# Altium PCB cjb.PcbDoc (part 1 of 2)
Units mil, origin at the board's own origin, x right, y up, seen from the top; angles counter-clockwise.
Board outline 3395 x 2755 mil, 2 copper layers (Top Layer, Bottom Layer), stack 62.8 mil thick; 117 components, 75 nets, 401 pads, 144 vias.
Unrouted connection lines stored in the file: 2.
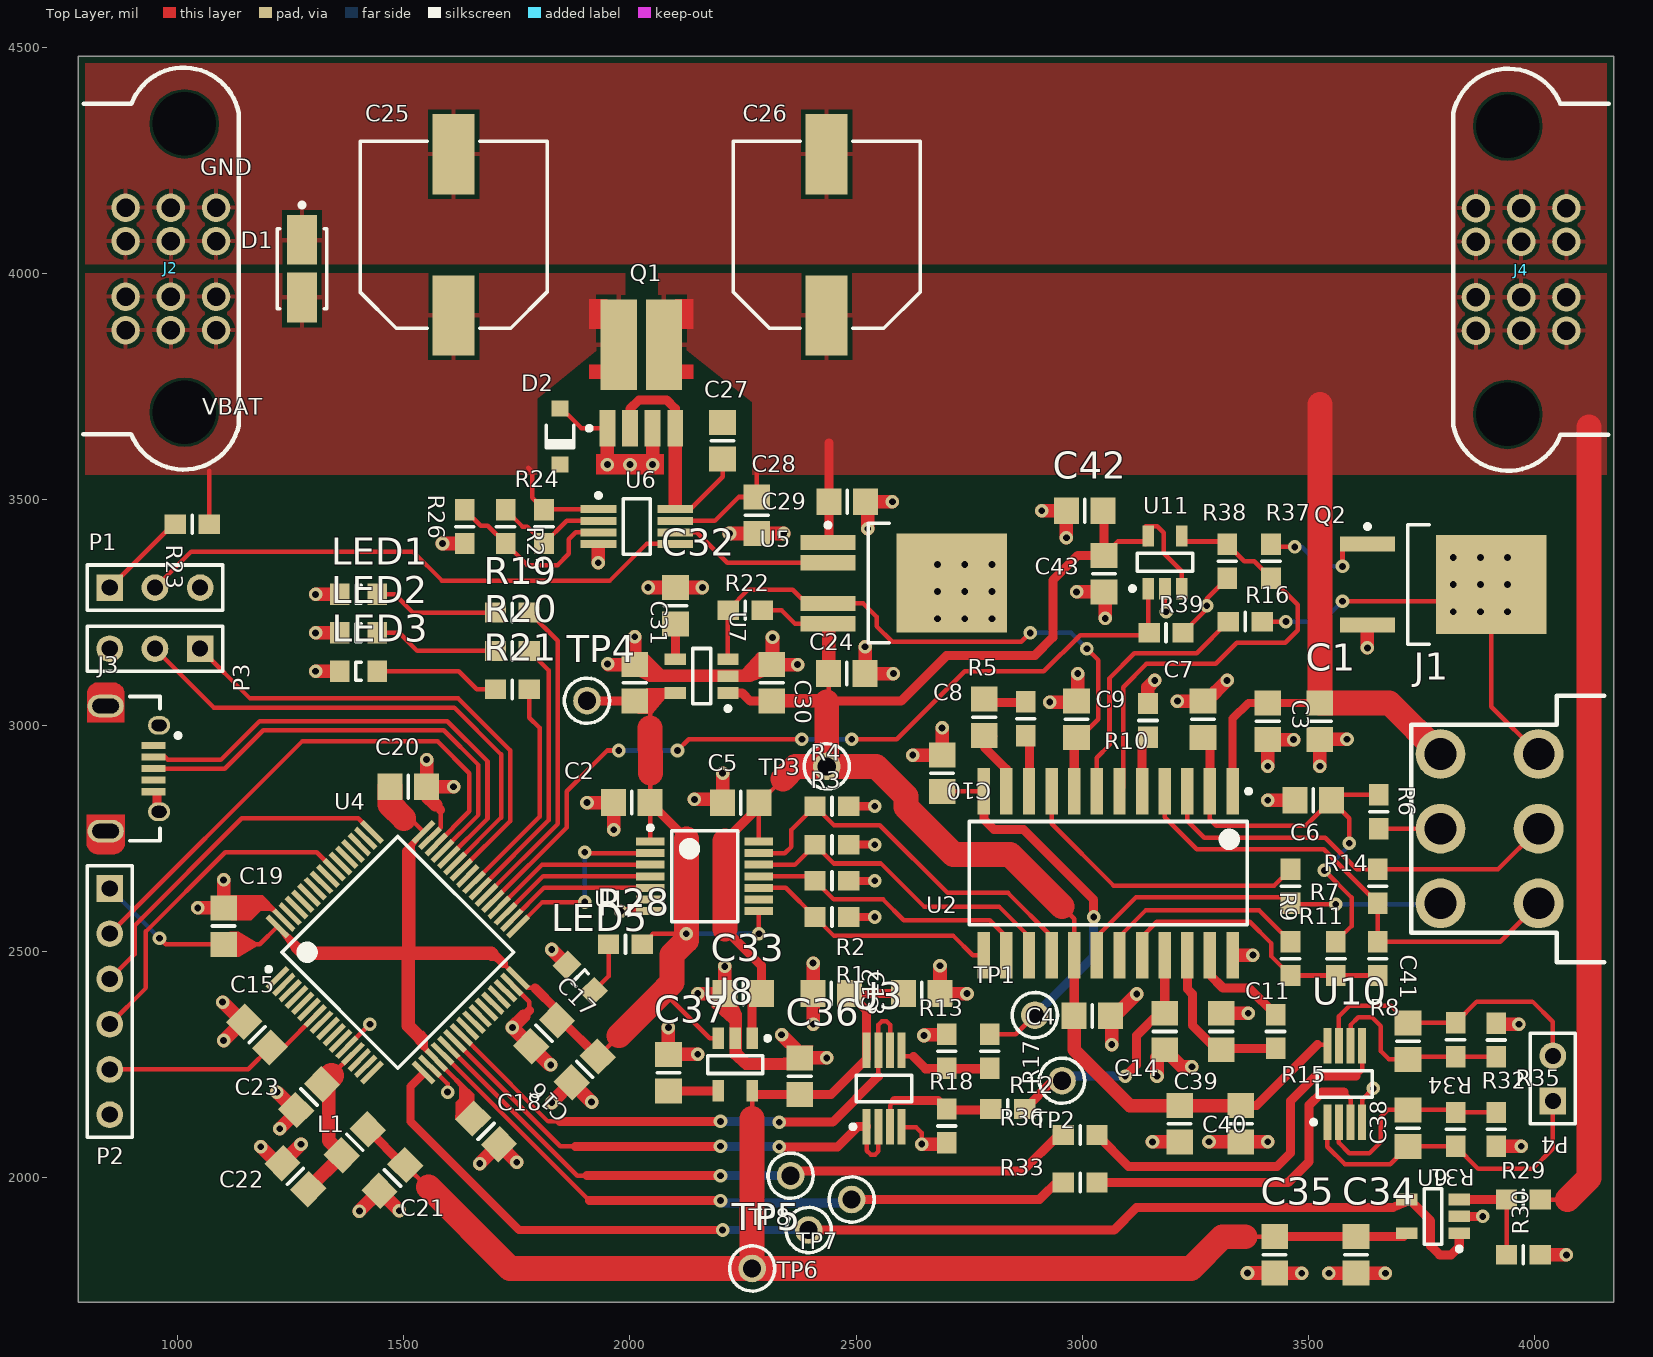
[diagram p0: Top Layer view]
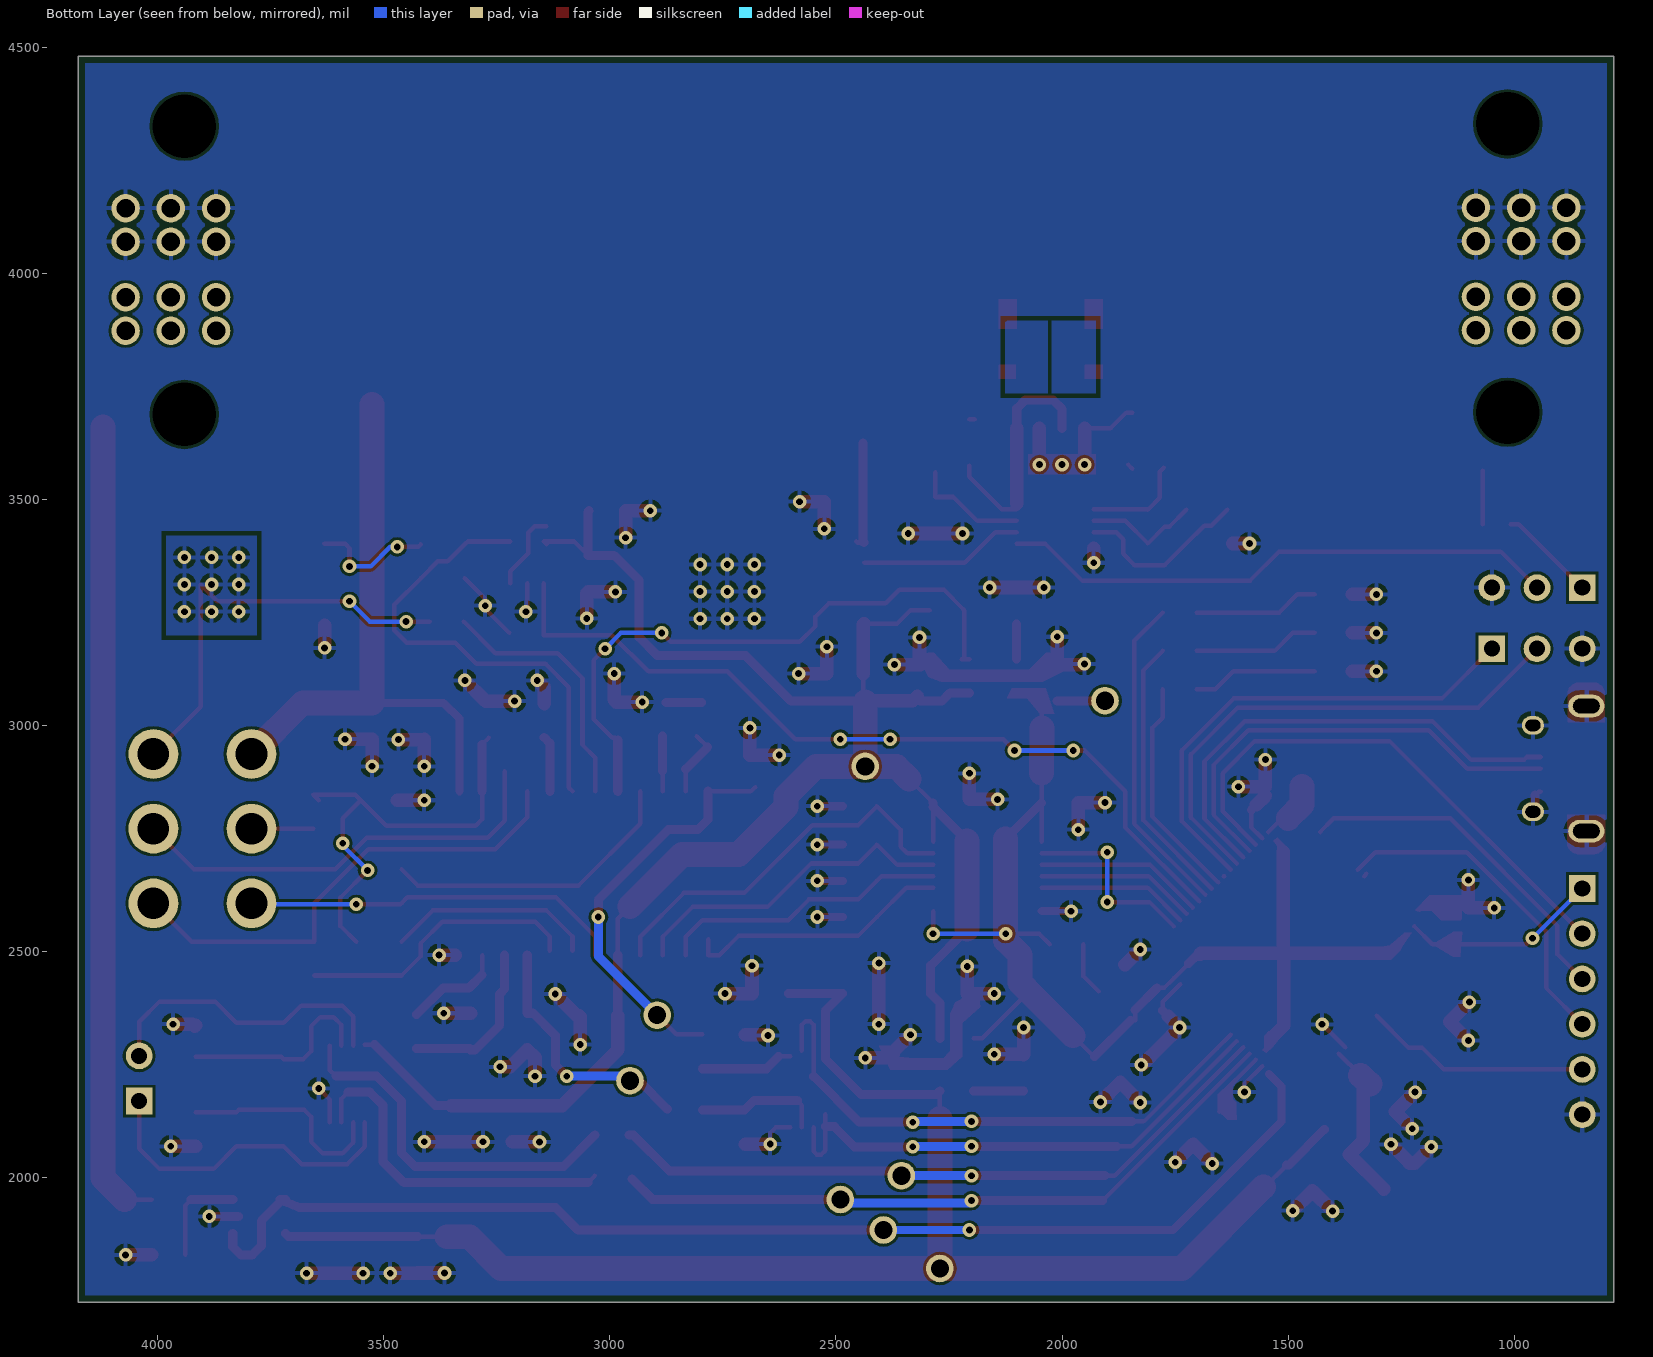
[diagram p1: Bottom Layer view, seen from below]

## Layer stack, top to bottom
Top Solder: solder mask 1, Solder Resist, Dk 3.5
Top Layer: signal copper 1.4
Dielectric 1: core 60, FR4, Dk 4.6
Bottom Layer: signal copper 1.4
Bottom Solder: solder mask 1, Solder Resist, Dk 3.5

## Board outline
780,1725 780,4480 4175,4480 4175,1725

## Design rules (kind name [scope] priority, off if disabled: settings)
BoardOutlineClearance [All] p1: gap=15 ignorepadtopadclearanceinfootprint=FALSE
Clearance [All] p1: gap=6 ignorepadtopadclearanceinfootprint=FALSE
DiffPairsRouting [All] p1: maxlimit=10 minlimit=10 mostfreqgap=10 toplayer_minwidth=10 toplayer_maxwidth=15 toplayer_prefwidth=10 bottomlayer_minwidth=10 bottomlayer_maxwidth=15 bottomlayer_prefwidth=10 maxuncoupledlength=500
HoleSize [All] p1: absolutevalues=TRUE maxlimit=200 minlimit=10 maxpercent=80.000 minpercent=20.000
MinimumAnnularRing [All] p1: minimumring=5
MinimumSolderMaskSliver [All] p1: minsoldermaskwidth=4
PlaneConnect [All] p1: planeconnectstyle=Direct reliefexpansion=20 reliefentries=4 reliefconductorwidth=10 reliefairgap=10
PolygonConnect [All] p1: connectstyle=Relief reliefconductorwidth=10 reliefentries=4 polygonreliefangle="90 Angle" airgapwidth=10
RoutingVias [All] p1: holewidth=6 width=16 viastyle="Through Hole" minholewidth=6 minwidth=16 maxholewidth=28 maxwidth=50
SilkToSolderMaskClearance [IsPad] p1: minsilkscreentomaskgap=6 clearancetoexposedcopper=TRUE
SolderMaskExpansion [All] p1: expansion=3
Width [All] p1: maxlimit=100 minlimit=6 preferedwidth=10 minimp=40.000000 maximp=50.000000 favimp=45.000000
25 further rules are at their usual default settings.

## Classes and differential pairs
component class U_heater: C42 C43 Q2 R37 R38 R39 U11
component class U_breakout: C38 C39 C40 C41 J1 J2 J3 J4 P2 P3 P4 R31 R32 R33 R34 R35 R36 TP7 TP8 U10
component class U_power: C24 C25 C26 C27 C28 C29 C30 C31 C32 C33 C34 C35 C36 C37 D1 D2 LED5 P1 Q1 R22 R23 R24 R25 R26 R28 R29 R30 TP3 TP4 TP5 TP6 U5 U6 U7 U8 U9
component class U_microcontroller: C15 C16 C17 C18 C19 C20 C21 C22 C23 L1 LED1 LED2 LED3 R19 R20 R21 U4
component class U_cj125: C1 C2 C3 C4 C5 C6 C7 C8 C9 C10 C11 C12 C13 C14 R1 R2 R3 R4 R5 R6 R7 R8 R9 R10 R11 R12 R13 R14 R15 R16 R17 R18 TP1 TP2 U1 U2 U3
differential pair USB_D: +USB_D_P -USB_D_N

## Components (designator, comment, footprint, x,y, rotation, side; value= is the part's Value field where it differs from the comment)
C1 "Generic 0805 Capacitor" 0805 3525,3010 r270 top value=1u
C2 "Generic 0805 Capacitor" 0805 2003.92,2829.86 r0 top value=100n
C3 "Generic 0805 Capacitor" 0805 3410,3010 r90 top value=33n
C4 "Generic 0805 Capacitor" 0805 3022,2358.35 r0 top value=33n
C5 "Generic 0805 Capacitor" 0805 2245,2829.21 r0 top value=100n
C6 "Generic 0805 Capacitor" 0805 3510,2835 r180 top value=DNI
C7 "Generic 0805 Capacitor" 0805 3266.71,3013.79 r90 top value=2.2n
C8 "Generic 0805 Capacitor" 0805 2783.33,3018.79 r90 top value=100n
C9 "Generic 0805 Capacitor" 0805 2987.06,3013.79 r90 top value=1n
C10 "Generic 0805 Capacitor" 0805 2690,2894.51 r270 top value=100n
C11 "Generic 0805 Capacitor" 0805 3307.06,2323.79 r270 top value=100n
C12 "Generic 0805 Capacitor" 0805 2645,2407.6 r180 top value=1u
C13 "Generic 0805 Capacitor" 0805 2445,2407.6 r0 top value=100n
C14 "Generic 0805 Capacitor" 0805 3182.06,2323.79 r90 top value=100n
C15 "Generic 0805 Capacitor" 0805 1175.72,2316.93 r315 top value=100n
C16 "Generic 0805 Capacitor" 0805 1900,2240 r45 top value=4.7u
C17 "Generic 0805 Capacitor" 0805 1810,2320 r45 top value=100n
C18 "Generic 0805 Capacitor" 0805 1681.72,2102.93 r135 top value=100n
C19 "Generic 0805 Capacitor" 0805 1101.72,2556.93 r270 top value=100n
C20 "Generic 0805 Capacitor" 0805 1510,2865 r180 top value=100n
C21 "Generic 0805 Capacitor" 0805 1475,2000 r45 top value=1u
C22 "Generic 0805 Capacitor" 0805 1260.45,2003.93 r315 top value=1u
C23 "Generic 0805 Capacitor" 0805 1290.45,2178.93 r45 top value=100n
C24 "Generic 0805 Capacitor" 0805 2479.41,3115 r0 top value=1u
C25 "Generic Electrolytic Capacitor" NIC-UUX2A470MNL1GS_M 1610,4085 r90 top value=22u
C26 "Generic Electrolytic Capacitor" NIC-UUX2A470MNL1GS_M 2434.74,4085 r90 top value=22u
C27 "Generic 0805 Capacitor" 0805 2204.65,3630 r90 top
C28 "Generic 0805 Capacitor" 0805 2280,3465 r90 top value=4.7u
C29 "Generic 0805 Capacitor" 0805 2480,3495 r180 top value=100n
C30 "Generic 0805 Capacitor" 0805 2313.5,3094.44 r270 top value=100n
C31 "Generic 0805 Capacitor" 0805 2010.5,3094.44 r270 top value=2.2u
C32 "Generic 0805 Capacitor" 0805 2100.43,3265 r270 top value=10n
C33 "Generic 0805 Capacitor" 0805 2250,2407.6 r180 top value=100n
C34 "Generic 0805 Capacitor" 0805 3605,1830 r90 top value=1u
C35 "Generic 0805 Capacitor" 0805 3425,1830 r90 top value=100n
C36 "Generic 0805 Capacitor" 0805 2375,2225 r270 top value=2.2u
C37 "Generic 0805 Capacitor" 0805 2085,2232.6 r270 top value=10n
C38 "Generic 0805 Capacitor" 0805 3720,2110 r270 top value=DNI
C39 "Generic 0805 Capacitor" 0805 3350,2120 r90 top value=1u
C40 "Generic 0805 Capacitor" 0805 3215,2120 r90 top value=100n
C41 "Generic 0805 Capacitor" 0805 3720,2302.67 r90 top value=DNI
C42 "Generic 0805 Capacitor" 0805 3005,3475 r0 top value=1u
C43 "Generic 0805 Capacitor" 0805 3047.6,3336 r90 top value=100n
D1 "SMAJ58CA" VISH-DO-214AC-2_M 1275,4010 r270 top
D2 "BZT52C15T-7" DIOD-SOD123-2_V 1845,3639.04 r270 top
J1 "IPBT-103-H1-XX-D-RA" IPBT-103-H1-XX-D-RA 3900,2772.13 r270 top
J2 "MPT-02-01-XX-X-RA-SD" MPT-02-01-XX-X-RA-SD 985,4008.88 r270 top
J3 "ZX62D-B-5PA8" HIRO-ZX62D-B-5PA8_V 900,2905 r270 top
J4 "MPT-02-01-XX-X-RA-SD" MPT-02-01-XX-X-RA-SD 3969.92,4009 r90 top
L1 "MI0805K601R-10" 0805 1391.72,2078.93 r225 top
LED1 "150080SS75000" 0805_A 1400,3290 r0 top
LED2 "150080SS75000" 0805_A 1400,3205 r0 top
LED3 "150080SS75000" 0805_A 1400,3120 r0 top
LED5 "150080SS75000" 0805_A 1890,2441.86 r315 top
P1 "Header 3" HDR1X3 850,3305 r0 top
P2 "Header 6" HDR1X6 850,2640 r270 top
P3 "Header 3" HDR1X3 1050,3170 r180 top
P4 "Header 2" HDR1X2 4040,2170 r90 top
Q1 "SI7288DP-T1-GE3" VISH-POWERPAKSO-8_A_V 2025,3802.21 r90 top
Q2 "NTD5865NLT4G" TO-252AA 3797.68,3311.86 r0 top
R1 "Generic 0603 Resistor" 0603 2446.5,2576.86 r0 top value="100k 5%"
R2 "Generic 0603 Resistor" 0603 2446.5,2656.86 r0 top value="100k 5%"
R3 "Generic 0603 Resistor" 0603 2446.5,2736.86 r0 top value="100k 5%"
R4 "Generic 0603 Resistor" 0603 2446.5,2821.86 r0 top value="100k 5%"
R5 "Generic 0603 Resistor" 0603 2875,3015 r270 top value="31.6k 1%"
R6 "Generic 0603 Resistor" 0603 3655,2809.53 r90 top value=0
R7 "Generic 0603 Resistor" 0603 3460,2645 r90 top value=301
R8 "Generic 0603 Resistor" 0603 3652.68,2485 r270 top value=470k
R9 "Generic 0603 Resistor" 0603 3460,2485 r90 top value=4.7k
R10 "Generic 0603 Resistor" 0603 3145,3011.39 r90 top value="10k 5%"
R11 "Generic 0603 Resistor" 0603 3560.43,2485 r270 top value=100k
R12 "Generic 0603 Resistor" 0603 2795,2280 r270 top value="187k 1%"
R13 "Generic 0603 Resistor" 0603 2700,2280 r270 top value="365k 1%"
R14 "Generic 0603 Resistor" 0603 3652.68,2645 r270 top value=61.9
R15 "Generic 0603 Resistor" 0603 3427.06,2323.79 r270 top value="100k 5%"
R16 "Generic 0603 Resistor" 0603 3360,3230 r180 top
R17 "Generic 0603 Resistor" 0603 2835,2152.4 r180 top value="187k 1%"
R18 "Generic 0603 Resistor" 0603 2700,2115 r90 top value="365k 1%"
R19 "Generic 0603 Resistor" 0603 1740,3250 r0 top value=470
R20 "Generic 0603 Resistor" 0603 1740,3165 r0 top value=470
R21 "Generic 0603 Resistor" 0603 1740,3080 r0 top value=470
R22 "Generic 0603 Resistor" 0603 2255,3255 r0 top value="100k 5%"
R23 "Generic 0603 Resistor" 0603 1032.6,3445 r0 top value="510k 5%"
R24 "Generic 0603 Resistor" 0603 1810,3440 r270 top value="6.34M 1%"
R25 "Generic 0603 Resistor" 0603 1725,3440 r270 top value="95.3k 1%"
R26 "Generic 0603 Resistor" 0603 1635,3440 r270 top value="205k 1%"
R28 "Generic 0603 Resistor" 0603 1990,2516.58 r0 top value=470
R29 "Generic 0603 Resistor" 0603 3975,1952.4 r180 top value="768k 1%"
R30 "Generic 0603 Resistor" 0603 3975,1830 r180 top value="187k 1%"
R31 "Generic 0603 Resistor" 0603 3825,2107.47 r270 top value=187k
R32 "Generic 0603 Resistor" 0603 3915,2107.47 r90 top value=365k
R33 "Generic 0603 Resistor" 0603 2995,1990 r0 top value=150k
R34 "Generic 0603 Resistor" 0603 3825,2305.62 r90 top value=187k
R35 "Generic 0603 Resistor" 0603 3915,2305 r270 top value=365k
R36 "Generic 0603 Resistor" 0603 2995,2095 r0 top value=150k
R37 "Generic 0603 Resistor" 0603 3417.05,3363.15 r90 top
R38 "Generic 0603 Resistor" 0603 3320.34,3363.15 r90 top value=DNI
R39 "Generic 0603 Resistor" 0603 3185,3205 r180 top value=100k
TP1 "5001" KSTN-5001 2895,2360 r90 top
TP2 "5001" KSTN-5001 2955,2215 r90 top
TP3 "5001" KSTN-5001 2435,2910 r0 top
TP4 "5001" KSTN-5001 1905,3055 r0 top
TP5 "5001" KSTN-5001 2270,1800 r0 top
TP6 "5001" KSTN-5001 2395,1885 r90 top
TP7 "5001" KSTN-5001 2490,1952.4 r90 top
TP8 "5001" KSTN-5001 2355,2005 r90 top
U1 "LSF0204PWR" PW0014A_M 2165,2666.86 r0 top
U2 "CJ125" SOIC-24 3057.06,2673.79 r270 top
U3 "MCP6L02T-E/MS" MSOP8_M 2561.65,2198 r90 top
U4 "STM32L475RCT3" STM-LQFP64_L 1486.72,2498.93 r45 top
U5 "TLS850D0TEV50ATMA1" KVU0005A_M 2605,3315 r0 top
U6 "LT4367HMS" MSOP8_M 2015,3440 r0 top
U7 "TPS79933QDDCRQ1" DDC0005A_M 2158.5,3109.44 r180 top
U8 "TPS79933QDDCRQ1" DDC0005A_M 2232.6,2250.67 r270 top
U9 "MCP6L01T-E/OT" DDC0005A_M 3775,1915 r180 top
U10 "MCP6L02T-E/MS" MSOP8_M 3580,2208 r90 top
U11 "UCC27519DBVT" DDC0005A_M 3182.6,3361 r90 top

## Footprints (in the part's own frame and the unit in brackets; to place one, negate y for a bottom-side part, rotate by r counter-clockwise, add the part's x,y. Pads: shape width x height; smd on the part's side, far side on the other; paste and mask are expansions set on the pad)
0603 [mm] "0603 - Based on VIshey Recommendations"
  rect 1.2x1.1 smd mask+0.1: 1(-0.95,0) 2(0.95,0)
  silkscreen extent 0,-0.51 0,0.51, body extent -0.8,-0.4 0.8,0.4, height 0.76
0805 [mm] "0805 - Based on VIshey Recommendations"
  rect 1.4x1.5 smd mask+0.1: 1(-1.025,0) 2(1.025,0)
  silkscreen extent 0,-0.64 0,0.64, body extent -1,-0.63 1,0.63, height 1.02
0805_A [mm] "Chip LED, 2-Leads, Body 2.0x1.3mm, IPC Medium Density"
  rect 1.1x1.2 smd: 1(-1.05,0) 2(1.05,0)
  silkscreen extent -0.15,-0.5 0.15,0.5, body extent -1,-0.62 1,0.63, height 0.68
DDC0005A_M [mm] "SOT23, 5-Leads, Body 3.05x1.75mm, Pitch 0.95mm, IPC Low Density"
  rect 1.2x0.65 smd mask+0.076: 1(-1.475,0.95) 2(-1.475,0) 3(-1.475,-0.95) 4(1.475,-0.95) 5(1.475,0.95)
  silkscreen extent -1.6,-1.55 0.5,1.95, body extent -1.5,-1.52 1.5,1.52, height 1.45
DIOD-SOD123-2_V [mm] "SOD123, 2-Leads, Body 2.7x1.55mm, Height 1.45mm"
  rect 0.9x0.95 smd mask+0.076: 1(-1.575,0) 2(1.575,0)
  silkscreen extent -0.64,-0.82 0.64,0.77, body extent -1.35,-0.77 1.35,0.77, height 1.45
HDR1X2 [mm] "Connector; Header; 2 Position"
  rect 1.5x1.5 hole 0.9: 1(0,0)
  round 1.5 hole 0.9: 2(2.54,0)
  silkscreen extent -1.27,-1.27 3.81,1.27
HDR1X3 [mm] "Connector; Header; 3 Position"
  rect 1.5x1.5 hole 0.9: 1(0,0)
  round 1.5 hole 0.9: 2(2.54,0) 3(5.08,0)
  silkscreen extent -1.27,-1.27 6.35,1.27
HDR1X6 [mm] "Connector; Header; 6 Position"
  rect 1.5x1.5 hole 0.9: 1(0,0)
  round 1.5 hole 0.9: 2(2.54,0) 3(5.08,0) 4(7.62,0) 5(10.16,0) 6(12.7,0)
  silkscreen extent -1.27,-1.27 13.97,1.27
HIRO-ZX62D-B-5PA8_V [mm] "SMD, 5-Leads, Body 7.5x5mm, Pitch 0.65mm"
  rect 0.4x1.35 smd mask+0.051: 1(-1.3,1.175) 2(-0.65,1.175) 3(0,1.175) 4(0.65,1.175) 5(1.3,1.175)
  oval 1.05x1.25 hole 0.65 slot 0.85 at 90 deg mask+0.076: 6(-2.425,1.5) 7(2.425,1.5)
  oval 1.27x2.032 hole 0.825 slot 1.5 at 90 deg: 8(-3.512,-1.5) 9(3.512,-1.5)
  Top Layer region: 4.2,-2.45 4.391,-2.412 4.554,-2.304 4.662,-2.141 4.7,-1.95 4.7,-1.95 4.7,-1.05 4.662,-0.859 4.554,-0.696 4.391,-0.588 4.2,-0.55 4.2,-0.55 2.6,-0.55 2.6,-2.45
  Top Layer region: -4.2,-2.45 -4.391,-2.412 -4.554,-2.304 -4.662,-2.141 -4.7,-1.95 -4.7,-1.95 -4.7,-1.05 -4.662,-0.859 -4.554,-0.696 -4.391,-0.588 -4.2,-0.55 -4.2,-0.55 -2.6,-0.55 -2.6,-2.45
  Top Layer region: -4.2,-2.54 -4.492,-2.478 -4.718,-2.285 -4.826,-2.007 -4.826,-2.007 -4.826,-1.016 -4.724,-0.729 -4.497,-0.526 -4.2,-0.457 -4.2,-0.457 -2.6,-0.457 -2.6,-2.54
  Top Layer region: 4.2,-2.565 4.487,-2.489 4.704,-2.287 4.801,-2.007 4.801,-2.007 4.801,-0.991 4.706,-0.709 4.488,-0.506 4.2,-0.432 4.2,-0.432 2.6,-0.432 2.6,-2.565
  silkscreen extent -4.05,-0.15 4.05,2.69, body extent -4.05,-4.25 4.05,1.55, height 2.75
IPBT-103-H1-XX-D-RA [mil]
  round 110 hole 70 mask+3: 1(-165,108.5) 2(0,108.5) 3(165,108.5) 4(-165,-108.5) 5(0,-108.5) 6(165,-108.5)
  silkscreen extent -294,-174 295,254, body extent -274,-131 274,574, height 439
KSTN-5001 [mm] "Test Point, Through Hole, Dia 2.54mm"
  round 1.55 hole 1.016: 1(0,0)
  silkscreen extent -1.27,-1.27 1.27,1.27, body extent -1.24,-1.24 1.25,1.25, height 4.62
KVU0005A_M [mm] "DPAK, 5-Leads, Body 6.22x6.7mm, Pitch 1.14mm, IPC Low Density"
  rect 3.1x0.85 smd mask+0.076: 1(-4.25,2.28) 2(-4.25,1.14) 4(-4.25,-1.14) 5(-4.25,-2.28)
  rect 6.2x5.55 smd mask+0.076: 6(2.7,0)
  silkscreen extent -4.37,-3.35 -0.8,3.38, body extent -4.77,-3.25 5.13,3.25, height 2.32
MPT-02-01-XX-X-RA-SD [mm]
  round 1.6 hole 1.04 mask+0.075: 1(-3.458,2.54) 2(-3.458,0) 3(-3.458,-2.54) 4(-1.578,2.54) 5(-1.578,0) 6(-1.578,-2.54) 7(1.542,2.54) 8(1.542,0) 9(1.542,-2.54) 10(3.423,2.54) 11(3.423,0) 12(3.423,-2.54)
  round 0 hole 3.56 unplated: 25(-8.157,0.76) 26(8.026,0.76)
  silkscreen extent -11.32,-4.92 11.25,3.8, body extent -10.73,-11.49 10.63,3.32, height 10.93
MSOP8_M [mm] "TSOP, 8-Leads, Body 3x3mm, Pitch 0.65mm, IPC Low Density"
  rect 2x0.45 smd mask+0.046: 1(-2.15,0.975) 2(-2.15,0.325) 3(-2.15,-0.325) 4(-2.15,-0.975) 5(2.15,-0.975) 6(2.15,-0.325) 7(2.15,0.325) 8(2.15,0.975)
  silkscreen extent -2.27,-1.55 0.75,1.87, body extent -1.55,-1.55 1.55,1.55, height 1.1
NIC-UUX2A470MNL1GS_M [mm] "Aluminum Electrolytic Capacitor, Body 10.5x10.5mm, IPC Low Density"
  rect 4.5x2.35 smd mask+0.076: 1(-4.525,0) 2(4.525,0)
  silkscreen extent -5.25,-5.25 5.25,5.25, body extent -5.65,-5.25 5.65,5.25, height 10.8
PW0014A_M [mm] "SOP, 14-Leads, Body 5.1x4.5mm, Pitch 0.65mm, IPC Low Density"
  rect 1.6x0.45 smd mask+0.046: 1(-3.05,1.95) 2(-3.05,1.3) 3(-3.05,0.65) 4(-3.05,0) 5(-3.05,-0.65) 6(-3.05,-1.3) 7(-3.05,-1.95) 8(3.05,-1.95) 9(3.05,-1.3) 10(3.05,-0.65) 11(3.05,0) 12(3.05,0.65) 13(3.05,1.3) 14(3.05,1.95)
  silkscreen extent -3.17,-2.55 1.85,2.85, body extent -3.21,-2.5 3.21,2.5, height 1
SOIC-24 [mm] "SOIC, 24-Leads, Body 15.4x7.5mm, Pitch 1.27mm, IPC Low Density"
  rect 2.6x0.7 smd mask+0.076: 1(-4.6,6.985) 2(-4.6,5.715) 3(-4.6,4.445) 4(-4.6,3.175) 5(-4.6,1.905) 6(-4.6,0.635) 7(-4.6,-0.635) 8(-4.6,-1.905) 9(-4.6,-3.175) 10(-4.6,-4.445) 11(-4.6,-5.715) 12(-4.6,-6.985) 13(4.6,-6.985) 14(4.6,-5.715) 15(4.6,-4.445) 16(4.6,-3.175) 17(4.6,-1.905) 18(4.6,-0.635) 19(4.6,0.635) 20(4.6,1.905) 21(4.6,3.175) 22(4.6,4.445) 23(4.6,5.715) 24(4.6,6.985)
  silkscreen extent -4.72,-7.8 2.9,8.01, body extent -5.26,-7.72 5.26,7.72, height 1.7
STM-LQFP64_L [mm] "QFP, 64-Leads, Body 10x10mm, Pitch 0.5mm, IPC High Density"
  rect 1.6x0.3 smd mask+0.038: 1(-5.8,3.75) 2(-5.8,3.25) 3(-5.8,2.75) 4(-5.8,2.25) 5(-5.8,1.75) 6(-5.8,1.25) 7(-5.8,0.75) 8(-5.8,0.25) 9(-5.8,-0.25) 10(-5.8,-0.75) 11(-5.8,-1.25) 12(-5.8,-1.75) 13(-5.8,-2.25) 14(-5.8,-2.75) 15(-5.8,-3.25) 16(-5.8,-3.75) 33(5.8,-3.75) 34(5.8,-3.25) 35(5.8,-2.75) 36(5.8,-2.25) 37(5.8,-1.75) 38(5.8,-1.25) 39(5.8,-0.75) 40(5.8,-0.25) 41(5.8,0.25) 42(5.8,0.75) 43(5.8,1.25) 44(5.8,1.75) 45(5.8,2.25) 46(5.8,2.75) 47(5.8,3.25) 48(5.8,3.75)
  rect 0.3x1.6 smd mask+0.038: 17(-3.75,-5.8) 18(-3.25,-5.8) 19(-2.75,-5.8) 20(-2.25,-5.8) 21(-1.75,-5.8) 22(-1.25,-5.8) 23(-0.75,-5.8) 24(-0.25,-5.8) 25(0.25,-5.8) 26(0.75,-5.8) 27(1.25,-5.8) 28(1.75,-5.8) 29(2.25,-5.8) 30(2.75,-5.8) 31(3.25,-5.8) 32(3.75,-5.8) 49(3.75,5.8) 50(3.25,5.8) 51(2.75,5.8) 52(2.25,5.8) 53(1.75,5.8) 54(1.25,5.8) 55(0.75,5.8) 56(0.25,5.8) 57(-0.25,5.8) 58(-0.75,5.8) 59(-1.25,5.8) 60(-1.75,5.8) 61(-2.25,5.8) 62(-2.75,5.8) 63(-3.25,5.8) 64(-3.75,5.8)
  silkscreen extent -5.92,-4.6 4.6,4.6, body extent -6,-6 6,6, height 1.6
TO-252AA [mm] "TO-252AA based on IRLR2908"
  rect 3.1x0.85 smd mask+0.076: 1(-4.25,2.28) 3(-4.25,-2.28)
  rect 6.2x5.55 smd mask+0.076: 4(2.7,0)
  silkscreen extent -4.37,-3.35 -0.8,3.38, body extent -4.77,-3.25 5.13,3.25, height 2.32
VISH-DO-214AC-2_M [mm] "DO-214AC, 2-Leads, Body 4.5x2.79mm, IPC Low Density"
  rect 2.8x1.7 smd mask+0.076: 1(-1.625,0) 2(1.625,0)
  silkscreen extent -3.7,-1.4 2.25,1.4, body extent -2.25,-1.39 2.25,1.4, height 2.29
VISH-POWERPAKSO-8_A_V [mil] "SMD, 8-Leads, Body 6.15x5.155mm, Pitch 1.27mm"
  rect 80x35 smd mask+3: 1(-145,75) 2(-145,25) 3(-145,-25) 4(-145,-75)
  rect 200x80 smd mask+3: 5(40,-50) 6(40,50)
  Top Layer region: -35,-115 -5,-115 -5,-77.5 -35,-77.5
  Top Layer region: -35,75 -5,75 -5,115 -35,115
  Top Layer region: 75,75 140,75 140,115 75,115
  Top Layer region: 75,-115 140,-115 140,-75 75,-75
  silkscreen extent -150,110 -140,120, body extent -141,-100 101,101, height 46

## Part data
C1 C2 C3 C4 C5 C6 C7 C8 C9 C10 C11 C12 C13 C14 C15 C16 C17 C18 C19 C20 C21 C22 C23 C24 C27 C28 C29 C30 C31 C32 C33 C34 C35 C36 C37 C38 C39 C40 C41 C42 C43: library part C_0805
C25 C26: library part C_can, "Generic PCAP_10x10 Can Aluminum Electrolytic Capacitor", Voltage=200V
D1: "Transient Voltage Suppressor, 6.40 to 231 V, 58 V Stand-off Voltage, Bi-Directional, -55 to 155 degC, 2-pin DO-214AC, Pb-Free, Tape and Reel", Manufacturer="Vishay Semiconductor", Operating Junction and Storage Temperature Range="-55 to 150 degC", PartNumber=SMAJ58CA-E3/5A, Supplier Part Number 1=SMAJ58CALFCT-ND, ComponentLink1Description="Manufacturer URL", ComponentLink1URL=http://www.vishay.com/, ComponentLink2Description=Datasheet, ComponentLink2URL=http://www.vishay.com/docs/88390/smaj50a.pdf, ComponentLink3Description="Package Specification", ComponentLink3URL=http://www.vishay.com/docs/88390/smaj50a.pdf, DatasheetVersion=12/8/2013, ID (uA)=2, IFSM="40 A", Mounting Technology="Surface Mount", PackageDescription="2-Pin DO-214AC (SMA), Body 4.245 x 2.665 mm", PackageReference=DO-214AC-2, Packing="Tape and Reel", PPPM (W)="400, 300", RoHS=TRUE, Supplier 1=Digi-Key, VBR Bi-Directional (V)="6.4 to 231", VWM (V)=58
D2: library part BZT52C15T, "Zener Diode 15V 300mW ±6% Surface Mount SOD-523", Manufacturer="Diodes Inc", Maximum Reverse Current="0.1 uA", Operating Temperature="-65 to 150 degC", PartNumber=BZT52C16-7-F, Power Max="500 mW", Voltage Zener="16 V Typ.", ComponentLink1Description="Manufacturer URL", ComponentLink1URL=http://www.diodes.com/, ComponentLink2Description=Datasheet, ComponentLink2URL=http://www.diodes.com/datasheets/ds18004.pdf, ComponentLink3Description="Package Specification", ComponentLink3URL=http://www.diodes.com/datasheets/ap02002.pdf, DatasheetVersion="Rev. 37-2", Maximum Zener Impedance f="1 kHz ZZK=200 Ohm", Mounting Technology="Surface Mount", PackageDescription="2-Pin SOD123, Body 2.7 x 1.55 mm, Height 1.45 mm", PackageReference=SOD123, PackageVersion="Rev. 79", Packing="Tape and Reel", RoHS=TRUE, Tol V="5.56% Typ."
J1: "0.165 INCH DOUBLE ROW TERMINAL ASSEMBLY", ComponentLink1Description="Manufacturer URL", ComponentLink1URL=http://www.linear.com/, ComponentLink2Description=Datasheet, ComponentLink2URL=http://cds.linear.com/docs/en/datasheet/4356fa.pdf, ComponentLink3Description="Package Specification", ComponentLink3URL=http://cds.linear.com/docs/en/packaging/05081661_F_MS.pdf
J3: library part Micro_USB, "Micro-USB Connector Meeting USB 2.0 Standard, -30 to 85 degC, 5-Pin SMD, RoHS, Tape and Reel", Color=Black, Current Rating=1A, Manufacturer=HiroseElectric, Operating Temperature Range=-30Cto+85C, Package Description="5-Pin Surface Mount Device, Body 7.5 x 5 mm, Pitch 0.65 mm", Voltage Rating=30V, Brand=HiroseConnector, Connector Type=Receptacle, Contact Material=CopperAlloy, Contact Plating=Gold, Datasheet URL=https://datasheet.ciiva.com/22825/0900766b8118f7b1-22825836.pdf, Datasheet Version=08/2010, Factory Pack Quantity=2000, Gender=Male, Manufacturer URL=https://www.hirose.com, Mounting Angle=Right, Mounting Technology=SurfaceMount, Number of Contacts=5Contact, Number of Ports=1Port, Package Reference=ZX62D-B-5PA8, Packaging=Reel, Product=MicroUSBTypeBConnectors, Product Category=USBConnectors, RoHS=Details, Series=ZX, Shell Plating=Tin, Standard=USB2.0, Termination Style=Solder
L1: library part MI0805K, "Chip Bead for Power Filtering, 1500 mA, 600 Ohm, -40 to 125 degC, 0805 (2012 Metric), RoHS, Tape and Reel", Current Rating (Max)=1.5A, DC Resistance (DCR) (Max)=100mOhm, Impedance @ Frequency=600Ohm@100MHz, Manufacturer=Laird, Operating Temperature=-40degC~125degC, Package / Case=0805(2012Metric), Package Description="2-Pin Surface Mount Device, Body 2 x 1.25 mm", Package Reference=MI0805K601R-10-2, Ratings=-, Standard Package=1, Catalog Drawings=(HI,HZ,LI,MI)0805Series_1.10mmMax.Height, Category=Filters, Datasheet URL=https://datasheet.ciiva.com/3082/mi0805k601r-10-a-vp-3082219.pdf, Datasheet Version="Rev. A, 01/2004", Family=FerriteBeadsandChips, Filter Type=PowerLine, Height (Max)="0.043\"(1.10mm)", Kits=240-2227-ND-KITEMIFERRITEBEADCHIPSMD, Manufacturer URL=https://www.lairdtech.com, Mounting Type=SurfaceMount, Number of Lines=1, Online Catalog=MISeries, Other Names=240-2390-1, Packaging=CutTape(CT), Series=MI, Size / Dimension="0.079\"Lx0.049\"W(2.00mmx1.25mm)"
LED1 LED2 LED3 LED5: library part LED_0805, "SMD mono-color Chip LED, WL-SMCW, Super Red", Color="Super Red", Manufacturer="Wuerth Elektronik", ComponentLink1Description="Manufacturer URL", ComponentLink1URL=http://www.we-online.com, ComponentLink2Description=Datasheet, ComponentLink2URL=http://katalog.we-online.com/led/datasheet/150080SS75000.pdf, PackageReference=0805_A, PartNumber=150080SS75000
P1 P3: "Header, 3-Pin", LatestRevisionDate=17-Jul-2002, LatestRevisionNote="Re-released for DXP Platform.", Publisher="Altium Limited"
P2: "Header, 6-Pin", LatestRevisionDate=17-Jul-2002, LatestRevisionNote="Re-released for DXP Platform.", Publisher="Altium Limited"
P4: "Header, 2-Pin", LatestRevisionDate=17-Jul-2002, LatestRevisionNote="Re-released for DXP Platform.", Publisher="Altium Limited"
Q1: library part SI7288DP, "Dual N-Channel (D-S) MOSFET, 40 V, 20 A, -55 to 150 degC, 8-Pin POWERPAKSO-8, RoHS, Tape and Reel", Current - Continuous Drain (Id) @ 25°C=20A, Drain to Source Voltage (Vdss)=40V, Input Capacitance (Ciss) @ Vds=565pF@20V, Manufacturer=Vishay, Package / Case=PowerPAK®SO-8Dual, Package Description="8-Pin Surface Mount Device, Body 6.15 x 5.155 mm, Pitch 1.27 mm", Package Reference=POWERPAKSO-8, Power - Max=15.6W, Standard Package=1, Category=DiscreteSemiconductorProducts, Datasheet URL=http://www.vishay.com/docs/65366/si7288dp.pdf, Datasheet Version="Rev. A, 10/2009", Family=FETs-Arrays, FET Feature=Standard, FET Type=2N-Channel(Dual), Gate Charge (Qg) @ Vgs=15nC@10V, Manufacturer URL=http://www.vishay.com/, Mounting Technology=SurfaceMount, Mounting Type=SurfaceMount, Online Catalog=N-ChannelStandardFETs, Other Names=SI7288DP-T1-GE3DKR, Packaging=Digi-Reel®, PCN Assembly/Origin=MultipleFabracationChanges09/Jul/2014, Rds On (Max) @ Id, Vgs=19mOhm@10A,10V, Series=TrenchFET®, Supplier Device Package=PowerPAK®SO-8Dual, Vgs(th) (Max) @ Id=2.8V@250µA
Q2: library part NTD5865NL, "N-Channel 60V 46A (Tc) 71W (Tc) Surface Mount DPAK"
R1 R2 R3 R4 R5 R6 R7 R8 R9 R10 R11 R12 R13 R14 R15 R16 R17 R18 R19 R20 R21 R22 R23 R24 R25 R26 R28 R29 R30 R31 R32 R33 R34 R35 R36 R37 R38 R39: library part R_0603
TP1 TP2 TP3 TP4 TP5 TP6 TP7 TP8: library part TP5001, "Test Point, Black, 1-Pin THD, RoHS, Bulk", Alternate Color="5004K-ND / -TESTPOINTPCMINI.040\"DYELLOW / 5003K-ND / -TESTPOINTPCMINI.040\"DORANGE / 5002K-ND / -TESTPOINTPCMINI.040\"DWHITE / 5000K-ND / -TESTPOINTPCMINI.040\"DRED", Color=Black, Manufacturer=Keystone, Standard Package=100, Catalog Drawings=5000Series, Category=TestandMeasurement, Datasheet URL=https://ciiva.com/datasheet-click-2917627?src=ciiva&sig=bd195616, Datasheet Version="Rev. G, 12/2008", Family=TestPoints, Kits="DKTGRS232C-KIT-ND / -TTLCONVERTER", Manufacturer URL=http://www.keyelco.com/, Material=Base,Nylon46,UL94V-0, Mounting Type="0.040\"(1.02mm)HoleDiameter", Online Catalog=ColorCodedTestPoints, Other Names=5001K, Packaging=Bulk, RoHS Information=RoHSComplianceStatement, Series=THM, Terminal="0.010\"x0.020\"(0.25mmx0.51mm)PhosphorBronzeWire,SilverPlated", Type=PCTestPoint,Miniature
U1: library part LSF0204, "4-Bit Bidirectional Voltage-Level Translator with Automatic Direction Sensing and +/- 15-kV ESD Protection, -40 to 85 degC, 14-Pin TSSOP (PW), Green (RoHS & Sb/Br), Tape and Reel", Manufacturer="Texas Instruments", Operating Temperature=-40°C~85°C, Package / Case="14-TSSOP(0.173\",4.40mmWidth)", Package Description="14-Pin Thin Shrink Small Outline Package, Body 5 x 4.4 mm, Pitch 0.65 mm", Package Reference=PW14, Standard Package=1, Supplier Device Package=14-TSSOP, Voltage - Supply=1.2V~3.6V,1.65V~5.5V, Category=IntegratedCircuits(ICs), Data Rate=100Mbps, Datasheet URL=http://www.ti.com/general/docs/lit/getliterature.tsp?genericPartNumber=TXB0104&fileType=pdf, Datasheet Version="Rev. G, 11/2014", Differential - Input=Output:No/No, Dynamic Catalog=TXBSeries, Family=Logic-Translators, Input Type=Logic, Logic Function=Translator,Bidirectional, Manufacturer URL=http://www.ti.com/, Mounting Technology=SurfaceMount, Number of Bits=4, Number of Channels=4, Number of Outputs/Channel=1, Other Names=296-21929-6, Output Type=Logic, Packaging=Digi-Reel®, Product Training Modules=VoltageLevelTranslation, Propagation Delay (Max)=4ns, Series=-
U2: "5V 2Mbaud SMT Lambda Probe Interface IC - SOIC-24", Package Reference=SOIC-24, Supplier Part Number 1=0272240104, Supplier 1="Future Electronics"
U3 U10: library part MCP6L02, "1 MHz, 85 μA Dual Op Amp, 8-Pin MSOP, Extended Temperature Range, Tape and Reel", ComponentLink1Description="Manufacturer URL", ComponentLink1URL=http://www.microchip.com/, ComponentLink2Description=Datasheet, ComponentLink2URL=http://ww1.microchip.com/downloads/en/DeviceDoc/22140b.pdf, ComponentLink3Description="Package Specification", ComponentLink3URL=http://www.microchip.com/stellent/groups/techpub_sg/documents/packagingspec/en012702.pdf, DatasheetVersion="revB, Sep-2011", PackageDescription="8-Lead Plastic Micro Small Outline Package (MS) [MSOP]", PackageReference=MSOP-MS8, PackageVersion="revBB, Aug-2009", RevisionNote="URLs added. DatasheetVersion updated."
U4: "Ultra-Low-Power ARM Cortex-M4 32-bit MCU+FPU, 256 KB Flash, 128 KB Internal RAM, 51 I/Os, 64-Pin LQFP, -40 to 125 degC, Tray", I/Os (High Current)=51, Operating Frequency(F) (Processor speed) (MHz)=80, Package=LQFP64, Package Description="64-Pin Low-profile Quad Flat Package, Body 10 x 10 mm, Pitch 0.5 mm", Supplier Part Number 1=497-16840-ND, Supply Voltage(Vcc) min (V)=1.71, ComponentLink1Description=Datasheet, ComponentLink1URL=http://www.st.com/content/ccc/resource/technical/document/datasheet/90/51/73/d2/53/60/4f/5f/DM00172872.pdf/files/DM00172872.pdf/jcr:content/translations/en.DM00172872.pdf, Core="ARM Cortex-M4", D/A Converter=2, DatasheetVersion="Rev. 4", FLASH Size (Prog) (kB)=256, Internal RAM Size (kB)=128, Mounting Technology="Surface Mount", Packing=Tray, Supplier 1=Digi-Key
U5: library part TLS850D0TE, "Linear Voltage Regulator IC  1 Output  500mA PG-TO252-5", Manufacturer="Texas Instruments", PartNumber=TPS7A6150QKVURQ1, Supplier Part Number 1=296-36856-6-ND, Accuracy(%)=2, Code_JEDEC=TO-252, ComponentLink1Description="Manufacturer URL", ComponentLink1URL=http://www.ti.com/, ComponentLink2Description=Datasheet, ComponentLink2URL=http://www.ti.com/general/docs/lit/getliterature.tsp?genericPartNumber=TPS7A6150-Q1&fileType=pdf, ComponentLink3Description="Package Specification", ComponentLink3URL=http://www.ti.com/lit/ml/mpsf019/mpsf019.pdf, DatasheetVersion=SLVSA62G, Eco-Plan="Green (RoHS & no Sb/Br)", Fixed Output Options(V)=5, Iout(Max)(A)=0.3, Iq(Typ)(mA)=0.02, Mounting Technology="Surface Mount", PackageDescription="5-Pin Plastic Flange Mount, Body 6.1 x 6.6 mm, Pitch 1.14 mm", PackageReference=KVU0005A, PackageVersion=4205521-3/D, SubFamily="Single Channel LDO", Supplier 1=Digi-Key, Vdo(Typ)(mV)=300, Vin(Max)(V)=40, Vin(Min)(V)=4, Vout Adj(Max)(V)=5, Vout Adj(Min)(V)=5
U6: library part LT4367, "100V Overvoltage, Undervoltage and Reverse Supply Protection Controller", ComponentLink1Description="Manufacturer URL", ComponentLink1URL=http://www.linear.com/, ComponentLink2Description=Datasheet, ComponentLink2URL=http://cds.linear.com/docs/en/datasheet/4356fa.pdf, ComponentLink3Description="Package Specification", ComponentLink3URL=http://cds.linear.com/docs/en/packaging/05081661_F_MS.pdf
U7 U8: library part TPS79933, "Single Output High PSRR LDO, 200 mA, Fixed 3.3 V Output, 2.7 to 6.5 V Input, with Low IQ, 5-pin SOT (DDC), -40 to 125 degC, Green (RoHS & no Sb/Br)", Manufacturer="Texas Instruments", Rating=Automotive, Accuracy(%)=2, Code_JEDEC=MO-193, ComponentLink1Description="Manufacturer URL", ComponentLink1URL=http://www.ti.com/, ComponentLink2Description=Datasheet, ComponentLink2URL=http://www.ti.com/general/docs/lit/getliterature.tsp?genericPartNumber=TPS79933-Q1&fileType=pdf, ComponentLink3Description="Package Specification", ComponentLink3URL=http://www.ti.com/litv/pdf/mpds123d, ComponentLink4Description="URL Link1", ComponentLink4URL="Samples URL:http://www.ti.com/product/tps79933-q1#samples", DatasheetVersion=SBVS097E, Eco-Plan="Green (RoHS & no Sb/Br)", Fixed Output Options(V)=3.3, Iout(Max)(A)=0.2, Iq(Typ)(mA)=0.04, Mounting Technology="Surface Mount", PackageDescription="5-Pin Plastic Small Outline, Body 2.9 x 1.6 mm, 0.95 mm Pitch", PackageReference=DDC0005A, PackageVersion=4204403-2/E, PartNumber=TPS79933QDDCRQ1, SubFamily="Single Channel LDO", Vdo(Typ)(mV)=90, Vin(Max)(V)=6.5, Vin(Min)(V)=2.7, Vout Adj(Max)(V)=3.3, Vout Adj(Min)(V)=3.3
U9: library part MCP6L01, "1 MHz, 85 uA Op Amp, 5-Pin SOT-23, Extended Temperature Range", Code_IPC=SOT23-5, ComponentLink1Description="Manufacturer URL", ComponentLink1URL=http://www.microchip.com/, ComponentLink2Description=Datasheet, ComponentLink2URL=http://ww1.microchip.com/downloads/en/DeviceDoc/22140b.pdf, ComponentLink3Description="Package Specification", ComponentLink3URL=http://www.microchip.com/stellent/groups/techpub_sg/documents/packagingspec/en012702.pdf, DatasheetVersion="revB, Sep-2011", PackageDescription="5-Lead Plastic Small Outline Transistor (OT) [SOT-23]", PackageReference=SOT-23-OT5, PackageVersion="revBB, Aug-2009", RevisionNote="URLs added. DatasheetVersion updated."
U11: library part UCC27519, "Low-Side Gate Driver IC Non-Inverting SOT-23-5"
J2 J4: ComponentLink1Description="Manufacturer URL", ComponentLink1URL=http://www.linear.com/, ComponentLink2Description=Datasheet, ComponentLink2URL=http://cds.linear.com/docs/en/datasheet/4356fa.pdf, ComponentLink3Description="Package Specification", ComponentLink3URL=http://cds.linear.com/docs/en/packaging/05081661_F_MS.pdf

## Via types
v1: diameter 30, hole 15, Top Layer to Bottom Layer, 144 vias

## Nets (pads, with @x,y where several pads share a name; then routed paths per layer and width w, separated by ;. In a path a pad name is that pad's centre, name@x,y a point inside that pad or via, vN(x,y) a via of type N, cw(c..) or ccw(c..) an arc to the next point about the centre after c; other vN are vias at no path point)
3V3A: C12.2 C13.2 C21.2 C34.2 C35.2 C36.2 L1.1 TP5.1 U3.8 U8.5 U9.5 | length 3417.2
  Top Layer w10: C21.2 1552.07,1980 1555,1980 ; 2270,2131.47 U8.5 ; 3360,1870 3360.35,1870.35 C35.2
  Top Layer w20: L1.1 1499.18,2028.53 C21.2 ; U8.5 2277.95,2184.65 C36.2 2444.65,2184.65 2523.27,2263.27 U3.8 2523.27,2369.68 C13.2 C12.2 ; C35.2 C34.2 3709.69,1870.35 U9.5
  Top Layer w55: 1555,1980 1735,1800 TP5.1 ; 2270,2131.47 TP5.1 ; 3360,1870 3310,1870 3240,1800 TP5.1
3V3D: C2.2 C16.2 C17.2 C18.2 C19.2 C20.2 C31.2 P2.1 R28.2 TP4.1 U1.1 U1.8 U4.19 U4.32 U4.48 U4.64 U7.5 U8.3 | length 3621.5
  Top Layer w10: v1(960,2530) 973.42,2516.58 C19.2 1181.43,2516.58 U4.64 ; 1500,2795 1513.58,2795 U4.48 ; U4.19 1638.72,2193.82 1638.72,2159.93 C18.2@1652.72,2145.93 ; 1720.52,2473.91 U4.32 1774.44,2420 1790,2420 ; C17.2@1838.53,2371.47 C17.2 C17.2@1848.53,2348.53 ; TP4.1 TP4.1@1905.91,3054.09 ; C16.2 1929.79,2268.53 1975.63,2314.37 ; R28.2 2050.82,2540 v1(2124.57,2540) ; 2044.28,2995 2044.28,3040 ; U1.1 2044.92,2829.21 2044.92,2895 2044.92,2900 ; 2079.13,2405.87 2176.26,2308.74 U8.3 ; 2093.13,2447.22 2110,2430.35 ; v1(2285,2540) 2285.08,2540.08 U1.8
  Top Layer w20: 1695,2495 1699.44,2495 1720.52,2473.91 ; 1790,2420 C17.2@1838.53,2371.47 ; C17.2@1848.53,2348.53 C16.2 ; TP4.1@1905.91,3054.09 C31.2 ; C2.2@2044.92,2829.21 2124.57,2749.57
  Top Layer w30: 1279.92,2496.93 1510,2496.93 ; 1510.72,2720.69 1510.72,2496.93 1644.72,2496.93 ; 1538.72,2307.93 1510,2336.65 1510,2367.65 1510,2496.93 ; 1695,2495 1693.07,2496.93 1644.72,2496.93 ; 1510,2496.93 1644.72,2496.93
  Top Layer w55: C20.2 1469.65,2825.35 1500,2795 ; 1975.63,2314.37 2062,2400.74 2093.13,2431.87 2093.13,2447.22 2093.13,2493.48 2124.57,2524.92 v1(2124.57,2540) 2124.57,2749.57 ; 2044.28,2995 2044.92,2895
  Bottom Layer w10: P2.1 v1(960,2530) ; v1(2124.57,2540) v1(2285,2540)
5V: C4.1 C5.2 C24.1 C30.2 C33.1 C39.2 C40.2 C42.2 C43.2 R22.2 TP3.1 U1.14 U2.17 U5.5 U7.1 U8.1 U10.8 U11.3 U11.5 | length 4395.7
  Top Layer w10: U1.14 2285.08,2820.08 C5.2@2285.08,2828.94 ; C5.2 2338.07,2881.93 ; R22.2 2335,3255 2364.76,3225.24 U5.5 ; 2435,3052.4 2439.06,3056.46 C24.1 ; 2955,2600 2982.06,2572.94 U2.17 ; C43.2 3078.24,3407 3145.2,3407 U11.5@3139.55,3401.35 ; U11.5@3140.2,3441 3165.2,3441 3180.2,3426 3180.2,3381 3220,3341.2 U11.3@3220,3315 ; 3519.65,2294.65 U10.8@3541.61,2294.65
  Top Layer w20: U7.1@2204.5,3072.04 U7.1 2247.96,3072.04 2265.91,3054.09 C30.2 ; 2210,2550 2290.35,2469.65 C33.1 2270,2387.24 U8.1 ; 2210,2745 C5.2@2285.08,2820.08 ; C5.2@2285.08,2828.94 C5.2 ; 2455,3054.09 2599.09,3054.09 2700,3155 2895,3155 2935,3195 2935,3321.19 2990.17,3376.35 C43.2 3047.6,3472.76 C42.2 ; C4.1@2982.06,2358.79 U2.17 ; C39.2 3385.36,2160.35 3519.65,2294.65
  Top Layer w30: C30.2@2320,3065 2330,3055 2419.06,3055 ; U5.5 2439.06,3223.85 C24.1 ; C4.1 2981.65,2283.35 3105,2160 C39.2@3350,2160
  Top Layer w55: 2210,2550 2210,2745 ; 2338.07,2881.93 2366.14,2910 TP3.1 ; 2435,3052.4 TP3.1 ; 2955,2600 2840,2715 2715,2715 2610,2820 2610,2843.82 2543.82,2910 TP3.1
5V_RESET: C9.1 R22.1 U2.8 U5.4 U7.3 | length 1376.4
  Top Layer w10: U7.3@2204.5,3146.84 U7.3 ; U7.3@2222.13,3146.84 U7.3 ; v1(2885,3205) 2865,3185 2580,3185 2545,3220 2545,3240.35 2515.24,3270.12 U5.4 2389.88,3270.12 2360,3300 2260.87,3300 2217.6,3256.73 R22.1 2216.57,3253.97 U7.3 ; C9.1@2982.06,2968.44 C9.1 2994.38,2973.44 3035,3014.06 3035,3145 v1(3010,3170)
  Top Layer w20: U2.8 C9.1@2982.06,2968.44
  Bottom Layer w10: v1(2885,3205) 2975,3205 v1(3010,3170) v1@3010,3165.87
12V: C1.1 C3.2 C26.1 C28.2 C29.2 J1.4 J4.1 J4.2 J4.3 J4.4 J4.5 J4.6 Q1.5 R29.1 U2.1 U5.1 U6.7 | length 3623.8
  Top Layer w10: U6.7 2187.8,3452.8 2240.35,3505.35 C28.2 2280,3560 ; U5.1 2452.41,3404.76 U5.1@2454.65,3407 ; R29.1 4072.4,1952.4
  Top Layer w18: U2.1@3332.21,2854.75 U2.1 3332.06,3015.35 3367.07,3050.35 C3.2 C1.1
  Top Layer w20: U5.1 2439.65,3406.73 C29.2 2439.65,3624.65
  Top Layer w55: 3525,3710 C1.1 3678.27,3050.35 J1.4 ; 4072.4,1952.4 4120,2000 4120,3660
12V_BUF: TP6.1 U4.17 U9.1 U9.4 | length 2689.5
  Top Layer w18: U4.17@1542.15,2229.55 1515,2202.4 1515,2125 1755,1885 v1(2204.65,1885)
  Top Layer w20: TP6.1 3070,1885 3120,1935 3686.98,1935 3718.7,1948.13 U9.4@3724.47,1950.53 ; U9.4 3722.6,1952.4 U9.4@3724.47,1950.53 ; U9.4@3729,1952.4 U9.4@3724.47,1950.53 ; U9.1 3833.07,1848.07 3815,1830 3790,1830 3770,1850 3770,1905 U9.4@3724.47,1950.53
  Bottom Layer w18: v1(2204.65,1885) TP6.1
CF: C11.2 R15.2 U2.22 | length 367.1
  Top Layer w10: C11.2 C11.2@3310.02,2286.39
  Top Layer w20: U2.22 3232.06,2417.94 3243.33,2406.67 3243.33,2337.66 3297.55,2283.44 C11.2 ; C11.2@3310.02,2286.39 R15.2
CJ125_IA: J1.3 R8.1 R14.2 U2.4 | length 1083
  Top Layer w10: U2.4 3182.06,2797.06 3252.73,2726.39 3533.89,2726.39 R14.2 R8.1 3923.78,2522.4 J1.3
CJ125_IP: J1.2 R14.1 U2.3 | length 967.2
  Top Layer w10: U2.3@3232.06,2898.79 U2.3 3232.06,2789.66 3269.33,2752.39 3536.72,2752.39 3606.71,2682.4 R14.1 3918.78,2682.4 J1.2
CJ125_SPI_MISO: U1.4 U4.35 | length 354.6
  Top Layer w10: U4.35 1807.76,2666.86 U1.4
CJ125_SPI_MOSI: U1.3 U4.36 | length 373.3
  Top Layer w10: U4.36 1805.51,2692.45 U1.3
CJ125_SPI_SCK: U1.5 U4.34 | length 335.8
  Top Layer w10: U4.34 1810.01,2641.27 U1.5
CJ125_SPI_SEL: U1.2 U4.33 | length 425.5
  Top Layer w10: U4.33 1806.58,2610 v1(1900,2610) ; v1(1900,2720) 1901.96,2718.04 U1.2
  Bottom Layer w10: v1(1900,2610) v1(1900,2720)
CJ125_UA: U3.1 U3.2 U4.22 | length 1189.8
  Top Layer w10: U4.22 1643.43,2272.62 1845.99,2070.06 1879.94,2070.06 ; U3.1 U3.1@2523.27,2141.39 ; U3.1@2523.62,2112.16 2523.62,2060.19 2532.01,2051.8 2542.01,2051.8 2549.21,2059.01 U3.2@2549.21,2112.16
  Top Layer w20: 1879.94,2070.06 v1(2200,2070.06) ; v1(2330,2068.93) 2458.93,2068.93 2503.35,2113.35 U3.1
  Bottom Layer w20: v1(2200,2070.06) v1@2330,2070.06
CJ125_UN: J1.5 R6.1 | length 136.5
  Top Layer w10: R6.1 J1.5
CJ125_UR: U3.6 U3.7 U4.23 | length 1247.3
  Top Layer w10: U4.23 1657.33,2286.56 ; 1657.33,2286.52 1818.85,2125 1845,2125 ; 2549.21,2224.56 2549.21,2339.01 2557.01,2346.8 2567.01,2346.8 2574.8,2339.01 U3.6@2574.8,2281.45
  Top Layer w20: 1845,2125 v1(2200,2125) ; v1(2330,2123.35) 2448.01,2123.35 2549.21,2224.56
  Bottom Layer w20: v1(2200,2125) v1@2330,2125
CJ125_VM: J1.6 R7.1 U2.18 | length 843.6
  Top Layer w10: U2.18 3032.06,2533.79 3118.56,2620.29 3447.3,2620.29 R7.1 3462.6,2605 v1(3560,2605)
  Bottom Layer w10: v1(3560,2605) 3789.37,2605 J1.6
CM: C8.1 U2.11 | length 151.5
  Top Layer w10: C8.1@2783.33,2952.66 C8.1@2807.06,2976.39 ; U2.11 U2.11@2832.06,2903.93
  Top Layer w20: C8.1@2783.33,2952.66 U2.11@2832.06,2903.93
DAC_OUT1: R33.1 TP7.1 U4.20 | length 1536.1
  Top Layer w10: U4.20 1910.37,1950
  Top Layer w20: 1910.37,1950 v1(2200,1950) ; TP7.1@2480,1960 2487.6,1952.4 TP7.1 2905,1952.4 R33.1@2950.1,1997.5
  Bottom Layer w20: v1(2200,1950) 2205,1945 2482.6,1945 TP7.1
DAC_OUT2: R36.1 TP8.1 U4.21 | length 1512.9
  Top Layer w10: U4.21 1883.21,2005 1905,2005
  Top Layer w20: 1905,2005 v1(2200,2005) ; TP8.1 2365,2015 2867.4,2015 2947.4,2095 R36.1
  Bottom Layer w20: v1(2200,2005) TP8.1
GND: C1.2 C2.1 C3.1 C4.2 C5.1 C6.2 C7.2 C9.2 C10.1 C11.1 C12.1 C13.1 C14.1 C15.1 C16.1 C17.1 C18.1 C19.1 C20.1 C21.1 C22.1 C23.1 C24.2 C25.2 C26.2 C28.1 C29.1 C30.1 C31.1 C32.1 C33.2 C34.1 C35.1 C36.1 C37.1 C39.1 C40.1 C42.1 C43.1 D1.1 J2.1 J2.2 J2.3 J2.4 J2.5 J2.6 J3.5 J3.6 J3.7 J3.8 J3.9 J4.7 J4.8 J4.9 J4.10 J4.11 J4.12 LED1.1 LED2.1 LED3.1 LED5.1 P1.3 P2.6 P3.3 Q2.3 R1.2 R2.2 R3.2 R4.2 R10.2 R13.1 R18.1 R26.2 R30.1 R32.1 R35.1 R38.1 R39.1 U1.7 U2.24 U3.4 U4.12 U4.18 U4.31 U4.47 U4.63 U5.6 U6.4 U7.2 U8.2 U9.2 U10.4 U11.2 | length 6229.6
  Top Layer w10: J3.5@941.26,2853.82 J3.5 ; U4.12 v1(1425,2339.78) ; U4.18 1596.72,2207.98 v1(1596.72,2189.93) ; U4.47 1581.23,2774.4 1581.23,2813.77 ; U4.31 1777.4,2389.2 1777.4,2370 ; v1(1950.5,3136.44) v1@1952.15,3134.8 ; C30.1 C30.1@2318.5,3139.8 ; U3.4@2600.39,2112.16 2632.32,2112.16 2645,2099.48 v1(2645,2075) ; C4.2@3067.42,2358.79 C4.2@3072.06,2358.79 ; U11.2@3182.6,3315 3182.6,3254.26 v1(3185,3251.86) ; R39.1 3275,3257.6 v1(3275,3265) 3275,3280.41 R38.1 ; v1@3584.65,2969.65 v1(3585,2970) ; U10.4 3618.39,2173.39 v1(3643,2198)
  Top Layer w18: v1@1980.43,2590.09 U1.7 ; R1.2 v1(2541,2576.86) ; R2.2 v1(2541,2656.86) ; R3.2 v1(2541,2736.86) ; R4.2 v1(2541,2821.86) ; Q2.3@3630.02,3221.75 Q2.3
  Top Layer w20: J3.7@954.06,2809.53 J3.5@954.06,2846.93 ; C20.1@1550.35,2844.65 C20.1 ; 1570,2825 1581.23,2813.77 ; 1765,2357.6 1777.4,2370 ; U9.2@3821,1915 U9.2 v1(3885,1915)
  Top Layer w30: v1(1044.72,2596.93) 1045.07,2597.29 C19.1 v1(1101.72,2658.93) ; v1(1099.4,2388.93) 1099.79,2388.93 1143.25,2345.47 v1(1101.72,2303.93) ; v1(1183.72,2068.93) 1220.18,2032.47 C22.1 1231.92,2033.6 v1(1272.72,2074.4) ; v1(1219.45,2189.93) 1260.45,2148.93 1263.22,2146.17 v1(1225.98,2108.93) ; v1(1305,3120) LED3.1 ; v1(1305,3205) LED2.1 ; v1(1305,3290) LED1.1 ; v1(1401.81,1926.81) C21.1 1490,1927.93 v1(1490,1927.75) ; C20.1@1550.35,2844.65 1570,2825 ; v1(1550.35,2925) C20.1 v1(1610,2865) ; v1(1585.54,3402.6) R26.2@1622.2,3402.6 ; v1(1667.79,2031.93) C18.1 v1(1749.72,2034.93) ; 1765,2357.6 v1(1740,2332.6) 1740.33,2332.6 C17.1 1822.93,2250 v1(1825,2250) ; v1(1826.86,2166.86) C16.1 v1(1915,2167.93) ; v1(1826.86,2505) LED5.1 ; v1(1905,2829.86) C2.1 1964,2829.43 v1(1964,2769.86) ; v1(1930,3360) 1930,3392.4 ; v1@1952.15,3134.8 C31.1 v1(2010.5,3196.44) ; v1(2040,3305.35) C32.1 v1(2160,3305.35) ; v1(2085,2332.6) C37.1 2085.55,2273.51 v1(2150,2273.51) ; v1(2142.45,2836.86) 2203.62,2836.86 2204.65,2837.88 v1(2204.65,2894.51) ; v1(2150,2407.6) C33.2 v1(2209.65,2467.6) ; v1(2220,3424.65) C28.1 v1(2340,3424.65) ; C30.1 v1(2370.5,3134.8) ; v1(2315,3195) 2315,3143.3 C30.1@2318.5,3139.8 ; v1(2335,2316.59) 2375,2276.59 C36.1 v1(2434.74,2265.35) ; v1(2404.65,2475) C13.1 2404.65,2340.35 v1(2405,2340) ; v1(2519.77,3174.41) C24.2 v1(2582.35,3115) ; v1(2525.35,3435) 2525.35,3495 v1(2580,3495) ; v1(2625,2934.86) C10.1 v1(2690,2995) ; v1(2645,2075) R18.1@2700,2075 ; v1(2650,2315) 2651.24,2316.24 R13.1@2700,2316.24 ; v1(2685.35,2469.29) C12.1 v1(2745,2407.6) ; v1(2910,3475) C42.1 v1(2964.65,3415.39) ; v1(2928,3052) 2984.91,3052 C9.2 2990,3057.09 v1(2990,3115) ; v1(2987.2,3295.65) C43.1 ; v1(3050.43,3237) C43.1@3050.43,3292.81 ; v1(3065,2294.78) 3065,2356.38 C4.2@3067.42,2358.79 ; C4.2@3072.06,2358.79 v1(3120,2406.73) ; R10.2 3145,3085 v1(3160,3100) ; v1(3155,2079.65) C40.1 C40.1@3215.35,2080 ; v1(3165,2224.99) 3165,2266.38 C14.1 3219.71,2245.79 v1(3242.06,2245.79) ; v1(3210,3054.15) C7.2 3274.15,3054.15 v1(3320,3100) ; v1(3280,2080) 3349.65,2080 C39.1 3350.35,2080 v1(3410,2080) ; C11.1 v1(3366.71,2364.15) ; U2.24@3341,2492.69 v1(3377.06,2492.69) ; v1(3365,1790) 3424.65,1790 C35.1 v1(3485,1789.65) ; v1(3410,2835) C6.2 ; v1(3410,2910) C3.1 3410.65,2969 v1(3467,2969) ; v1(3525,2910) C1.2 v1@3584.65,2969.65 ; v1(3545,1789.65) C34.1 v1(3670,1789.65) ; v1(3630.02,3171.86) Q2.3@3630.02,3221.75 ; R32.1 v1(3970,2070.06) ; R35.1@3915,2337.4 3917.4,2335 3922.4,2340 v1(3965,2340) ; R30.1 v1(4070,1830)
  other v1: 1980,2589.66 2680,3236.19 2740,3236.19 2800,3236.19 2680,3296.19 2740,3296.19 2800,3296.19 2680,3356.19 2740,3356.19 2800,3356.19
HEATER-: J1.1 Q2.4 R16.1 | length 958.5
  Top Layer w10: R16.1 v1(3450,3230) ; v1(3575.02,3275) 3867.12,3275 Q2.4 3903.98,3041.64 J1.1
  Bottom Layer w10: v1(3450,3230) 3530.02,3230 v1(3575.02,3275)
  other v1: 3820,3251.86 3880,3251.86 3940,3251.86 3820,3311.86 3880,3311.86 3940,3311.86 3820,3371.86 3880,3371.86 3940,3371.86
NetC6_1: C6.1 C7.1 R6.2 R11.1 U2.2 | length 1002.2
  Top Layer w10: C7.1 C7.1@3282.06,2958.09 ; U2.2 3282.06,2792.66 3296.33,2778.39 3493.75,2778.39 C6.1 ; v1(3535,2680) 3595,2620 3595,2556.98 R11.1 ; v1(3590,2740) 3590,2795.35 C6.1 ; R6.2@3643.07,2835 R6.2 3562.28,2846.93 C6.1
  Top Layer w20: U2.2 C7.1@3282.06,2958.09
  Bottom Layer w10: v1(3535,2680) 3590,2735 v1(3590,2740)
NetC8_2: C8.2 R5.1 | length 78.3
  Top Layer w20: C8.2@2796.74,3051.2 R5.1@2875,3051.2
NetC27_1: C27.1 D2.2 Q1.2 Q1.4 U6.8 | length 541.5
  Top Layer w10: D2.2@1845,3567.99 D2.2@1854.04,3577.03 ; U6.8@2100,3478.39 2133.39,3478.39 2205,3550 C27.1@2205,3574.65
  Top Layer w20: Q1.2 2000,3700 2020,3720 2080.69,3720 2100,3700.69 Q1.4
  Top Layer w30: 2100,3490.35 Q1.4
NetC27_2: C27.2 D2.1 Q1.1 Q1.3 | length 291.6
  Top Layer w10: D2.1@1845,3692.01 1857.99,3692.01 1892.79,3657.21 Q1.1 ; C27.2@2193.14,3676.86 C27.2@2205,3676.86
  Top Layer w30: v1(1950,3577.03) Q1.1 ; v1(2050,3577.03) Q1.3
  other v1: 2000,3577.03
NetC32_2: C32.2 U7.4 | length 77.8
  Top Layer w20: U7.4 C32.2
NetC37_2: C37.2 U8.4 | length 110.3
  Top Layer w20: C37.2 2085.35,2192.6 U8.4
NetC38_1: C38.1 R31.1 R32.2 U10.2 | length 476.6
  Top Layer w10: U10.2 3567.2,2077.8 3590,2055 3634.6,2055 3660,2080.4 3660,2135 3675.35,2150.35 C38.1 3819.51,2150.35 R31.1 R32.2
NetC38_2: C38.2 P4.1 R31.2 U10.1 | length 730
  Top Layer w10: U10.1 3541.61,2068.78 3580.4,2030 3680.35,2030 C38.2 3720.42,2070.06 R31.2 3875.06,2020 3995,2020 4040,2065 P4.1
NetC41_1: C41.1 R34.1 R35.2 U10.6 | length 448.1
  Top Layer w10: U10.6 3592.8,2338.26 3609.53,2355 3640.09,2355 3660,2335.09 3660,2280 3677.69,2262.31 C41.1 3725.91,2268.22 R34.1 3825.62,2267.6 R35.2
NetC41_2: C41.2 P4.2 R34.2 U10.7 | length 676.2
  Top Layer w10: U10.7 3567.2,2357.2 3591.24,2381.24 3681.78,2381.24 C41.2 R34.2 3871.98,2390 3995,2390 4040,2345 P4.2
NetLED1_2: LED1.2 R19.1 | length 277.8
  Top Layer w10: LED1.2 1480,3290 1520,3250 R19.1
NetLED2_2: LED2.2 R20.1 | length 277.8
  Top Layer w10: LED2.2 1490,3205 1530,3165 R20.1
NetLED3_2: LED3.2 R21.1 | length 277.8
  Top Layer w10: LED3.2 1621.22,3120 1661.22,3080 R21.1
NetLED5_2: LED5.2 R28.1 | length 117.8
  Top Layer w10: LED5.2 1952.6,2446 R28.1
NetP1_1: P1.1 R23.1 | length 215.6
  Top Layer w10: P1.1 990,3445 R23.1@1007.6,3445
NetP1_2: P1.2 U6.5 | length 1242.7
  Top Layer w10: P1.2 1029.65,3384.65 1520.35,3384.65 1584.35,3320.65 1955.65,3320.65 2036.61,3401.61 U6.5
NetQ2_1: Q2.1 R37.2 | length 277.5
  Top Layer w10: R37.2 3422.59,3395 v1(3469.65,3395) ; v1(3575.02,3351.86) 3575.02,3391.84 3584.8,3401.62 Q2.1
  Bottom Layer w10: v1(3469.65,3395) 3485,3395 3528.14,3351.86 v1(3575.02,3351.86)
NetR1_1: R1.1 U1.10 U2.13 | length 593.8
  Top Layer w10: U1.10 2344.69,2641.27 R1.1 2450.96,2535 2715,2535 2757.31,2492.69 U2.13 U2.13@2782.06,2527.94
NetR2_1: R2.1 U1.11 U2.14 | length 642.7
  Top Layer w10: U1.11 2399.1,2666.86 R2.1 2450.28,2615.68 2559.32,2615.68 2605,2570 2795,2570 2832.06,2532.94 U2.14
NetR3_1: R3.1 U1.12 U2.15 | length 740.6
  Top Layer w10: U1.12 2364.69,2692.45 R3.1 2450.76,2695.2 2554.8,2695.2 2650,2600 2815.86,2600 2882.06,2533.8 U2.15
NetR4_1: R4.1 U1.13 U2.16 | length 872
  Top Layer w10: U1.13 2342.38,2718.04 2356.92,2732.58 2356.92,2769.68 R4.1 2450.96,2780 2552.45,2780 2702.45,2630 2835.68,2630 2932.06,2533.62 U2.16
NetR7_2: R7.2 U2.9 | length 671.2
  Top Layer w10: U2.9 2932.06,2783.16 3068.83,2646.39 3423.99,2646.39 R7.2
NetR8_2: R8.2 R9.1 R11.2 U2.20 | length 631.3
  Top Layer w10: U2.20@3132.06,2502.69 3132.06,2533.79 3164.66,2566.39 3370,2566.39 3417.05,2519.35 3417.05,2490.55 R9.1 R11.2 R8.2
NetR9_2: R9.2 U2.19 | length 461.5
  Top Layer w10: U2.19@3082.06,2502.69 3082.06,2533.79 3139.66,2591.39 3391.01,2591.39 R9.2
NetR10_1: R10.1 U2.5 | length 124.5
  Top Layer w20: U2.5 3132.06,2961.05 R10.1
NetR12_2: R12.2 R13.2 U3.5 | length 206
  Top Layer w10: U3.5@2600.39,2268.92 2626.24,2268.92
  Top Layer w20: 2626.24,2268.92 2653.73,2241.43 R12.2@2795,2241.43
NetR16_2: R16.2 U2.7 | length 576.1
  Top Layer w10: U2.7 3032.06,2929.28 3060,2957.22 3060,3105 3115,3160 3252.6,3160 R16.2
NetR17_2: R17.2 R18.2 U3.3 | length 282.2
  Top Layer w10: U3.3@2574.8,2112.16 2574.8,2161.17 2585.24,2171.61
  Top Layer w20: 2585.24,2171.61 2680.8,2171.61 R18.2 2701.65,2150.76 R17.2@2795,2150.76
NetR19_2: R19.2 U4.38 | length 715.4
  Top Layer w10: U4.38 1840,2782.62 1840,3187.4 R19.2
NetR20_2: R20.2 U4.39 | length 605.6
  Top Layer w10: U4.39 1820,2790.46 1820,3122.4 R20.2
NetR21_2: R21.2 U4.40 | length 495.9
  Top Layer w10: U4.40 1800,2798.3 1800,2995 1777.4,3017.6 R21.2
NetR24_2: R24.2 R25.1 U6.2 | length 257.1
  Top Layer w10: R25.1 1762.4,3440 1772.6,3440 R24.2 1860.2,3452.8 U6.2
NetR25_2: R25.2 R26.1 U6.3 | length 394.8
  Top Layer w10: R26.1 1670.36,3442.04 1685.55,3442.04 R25.2 1772.6,3355 1840,3355 1865,3380 1865,3412.2 1880,3427.2 U6.3
NetR29_2: R29.2 R30.2 U9.3 | length 219.7
  Top Layer w10: R29.2@3925.2,1952.4 3937.6,1940 R30.2
  Top Layer w20: U9.3 R29.2@3925.2,1952.4
NetR33_2: R33.2 U10.3 | length 780.5
  Top Layer w10: R33.2@3032.4,2005 R33.2@3047.4,1990 ; 3577.8,2190 3592.8,2175 U10.3
  Top Layer w20: R33.2@3047.4,1990 3455,1990 3501,2036 3501,2160.93 3530.07,2190 3577.8,2190
NetR36_2: R36.2 U10.5 | length 825
  Top Layer w10: 3605,2225 3618.39,2238.39 U10.5
  Top Layer w20: R36.2 3102.4,2025 3430,2025 3460,2055 3460,2170 3515,2225 3605,2225
NetU5_2: U5.2 U6.6 | length 365.9
  Top Layer w10: U6.6 2147.8,3427.2 2215.12,3359.88 U5.2
NRST: C15.2 P2.5 U4.7 | length 503.4
  Top Layer w10: P2.5 1155.85,2240 C15.2 1234.42,2288.4 U4.7
PWM_DRIVE: R37.1 R38.2 U2.6 U11.4 | length 1041.3
  Top Layer w10: U2.6 3090,2862.83 3090,3084.8 3141.65,3136.44 3294.58,3136.44 3341.57,3183.43 3448.43,3183.43 3476,3211 3476,3266.79 R37.1 3379.65,3363.15 3357.74,3363.15 R38.2 3313.89,3407 U11.4@3220,3407
PWM_EN: R39.2 U4.37 U11.1 | length 1854
  Top Layer w10: U4.37 1860,2774.78 1860,2855 1950,2945 v1(1975,2945) ; v1(2105,2945) 2130,2970 v1(2380,2970) ; v1(2490,2970) 2590,2970 2740,3120 2915,3120 2995,3200 3145.2,3200 U11.1@3145.2,3315
  Bottom Layer w10: v1(1975,2945) v1(2105,2945) ; v1(2380,2970) v1(2490,2970)
RF: R15.1 U2.23 | length 225.2
  Top Layer w10: U2.23@3282.06,2448.79 U2.23
  Top Layer w20: U2.23@3282.06,2448.79 3310.86,2420 3368.26,2420 R15.1
RM: R5.2 U2.10 | length 122.9
  Top Layer w10: U2.10 2882.06,2898.79 U2.10@2883.33,2900.06
  Top Layer w20: U2.10@2883.33,2900.06 R5.2@2883.33,2977.23
SWCLK: P2.3 U4.49 | length 776.1
  Top Layer w10: P2.3 905,2495 905,2558.03 1141.97,2795 1399.44,2795 U4.49
SWDIO: P2.2 U4.46 | length 1188.5
  Top Layer w10: P2.2 1275,2965 1575,2965 1645,2895 1645,2810.33 U4.46
SWO: P2.4 U4.55 | length 742.8